# Altium PCB PCB_Amplificator_audio_de_putere-FINAL-var2_2026-01-23.pcbdoc
Units mm, origin at the board's own origin, x right, y up, seen from the top; angles counter-clockwise.
Board outline 79.12 x 80.26 mm, 2 copper layers (Top Layer, Bottom Layer); 40 components, 28 nets, 105 pads, 40 vias.
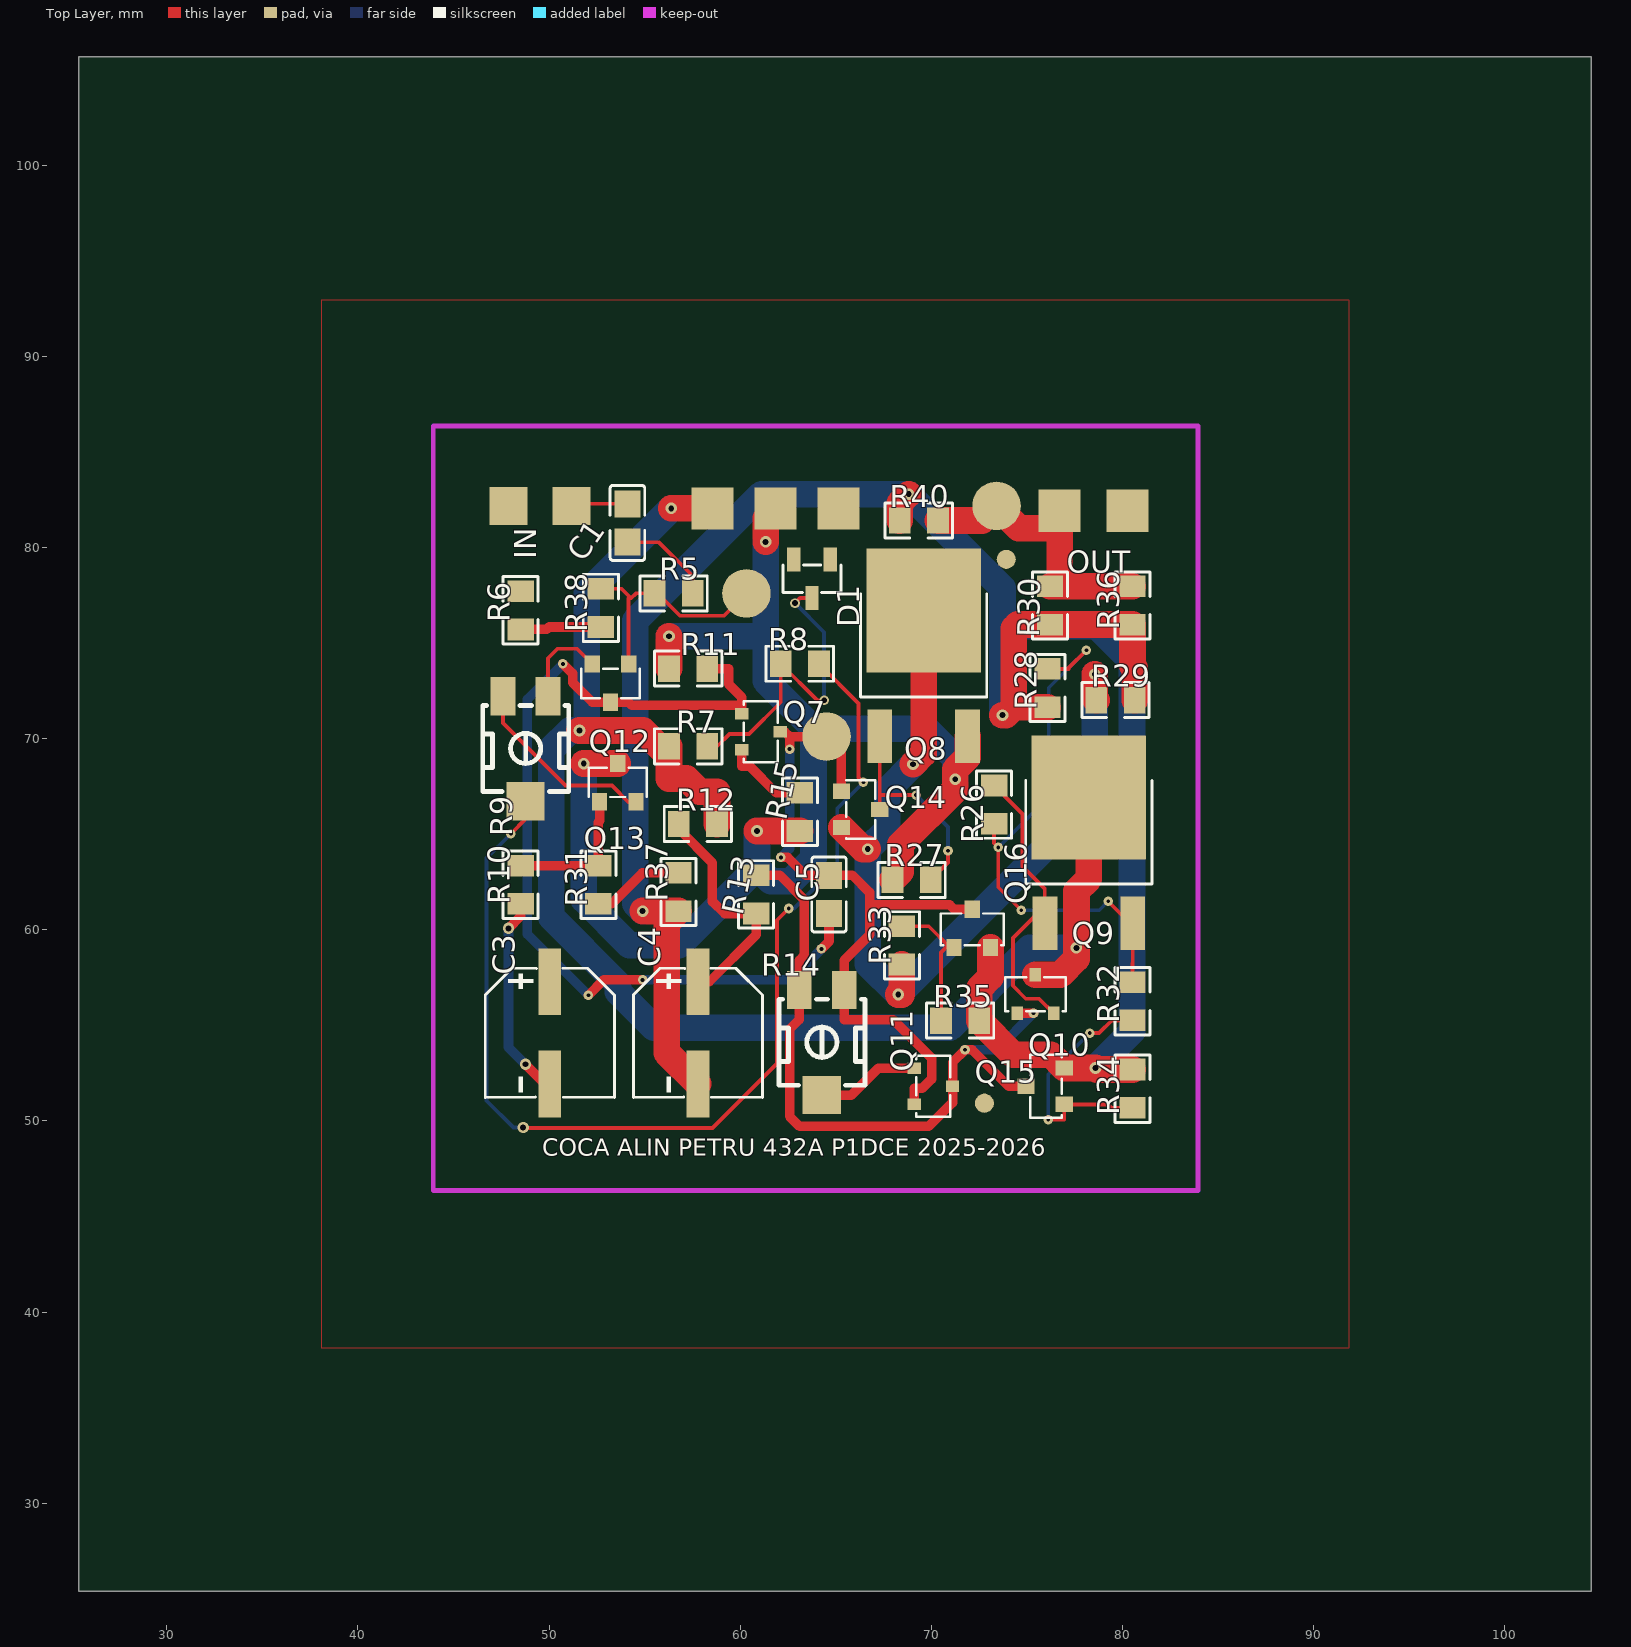
[diagram p0: Top Layer view]
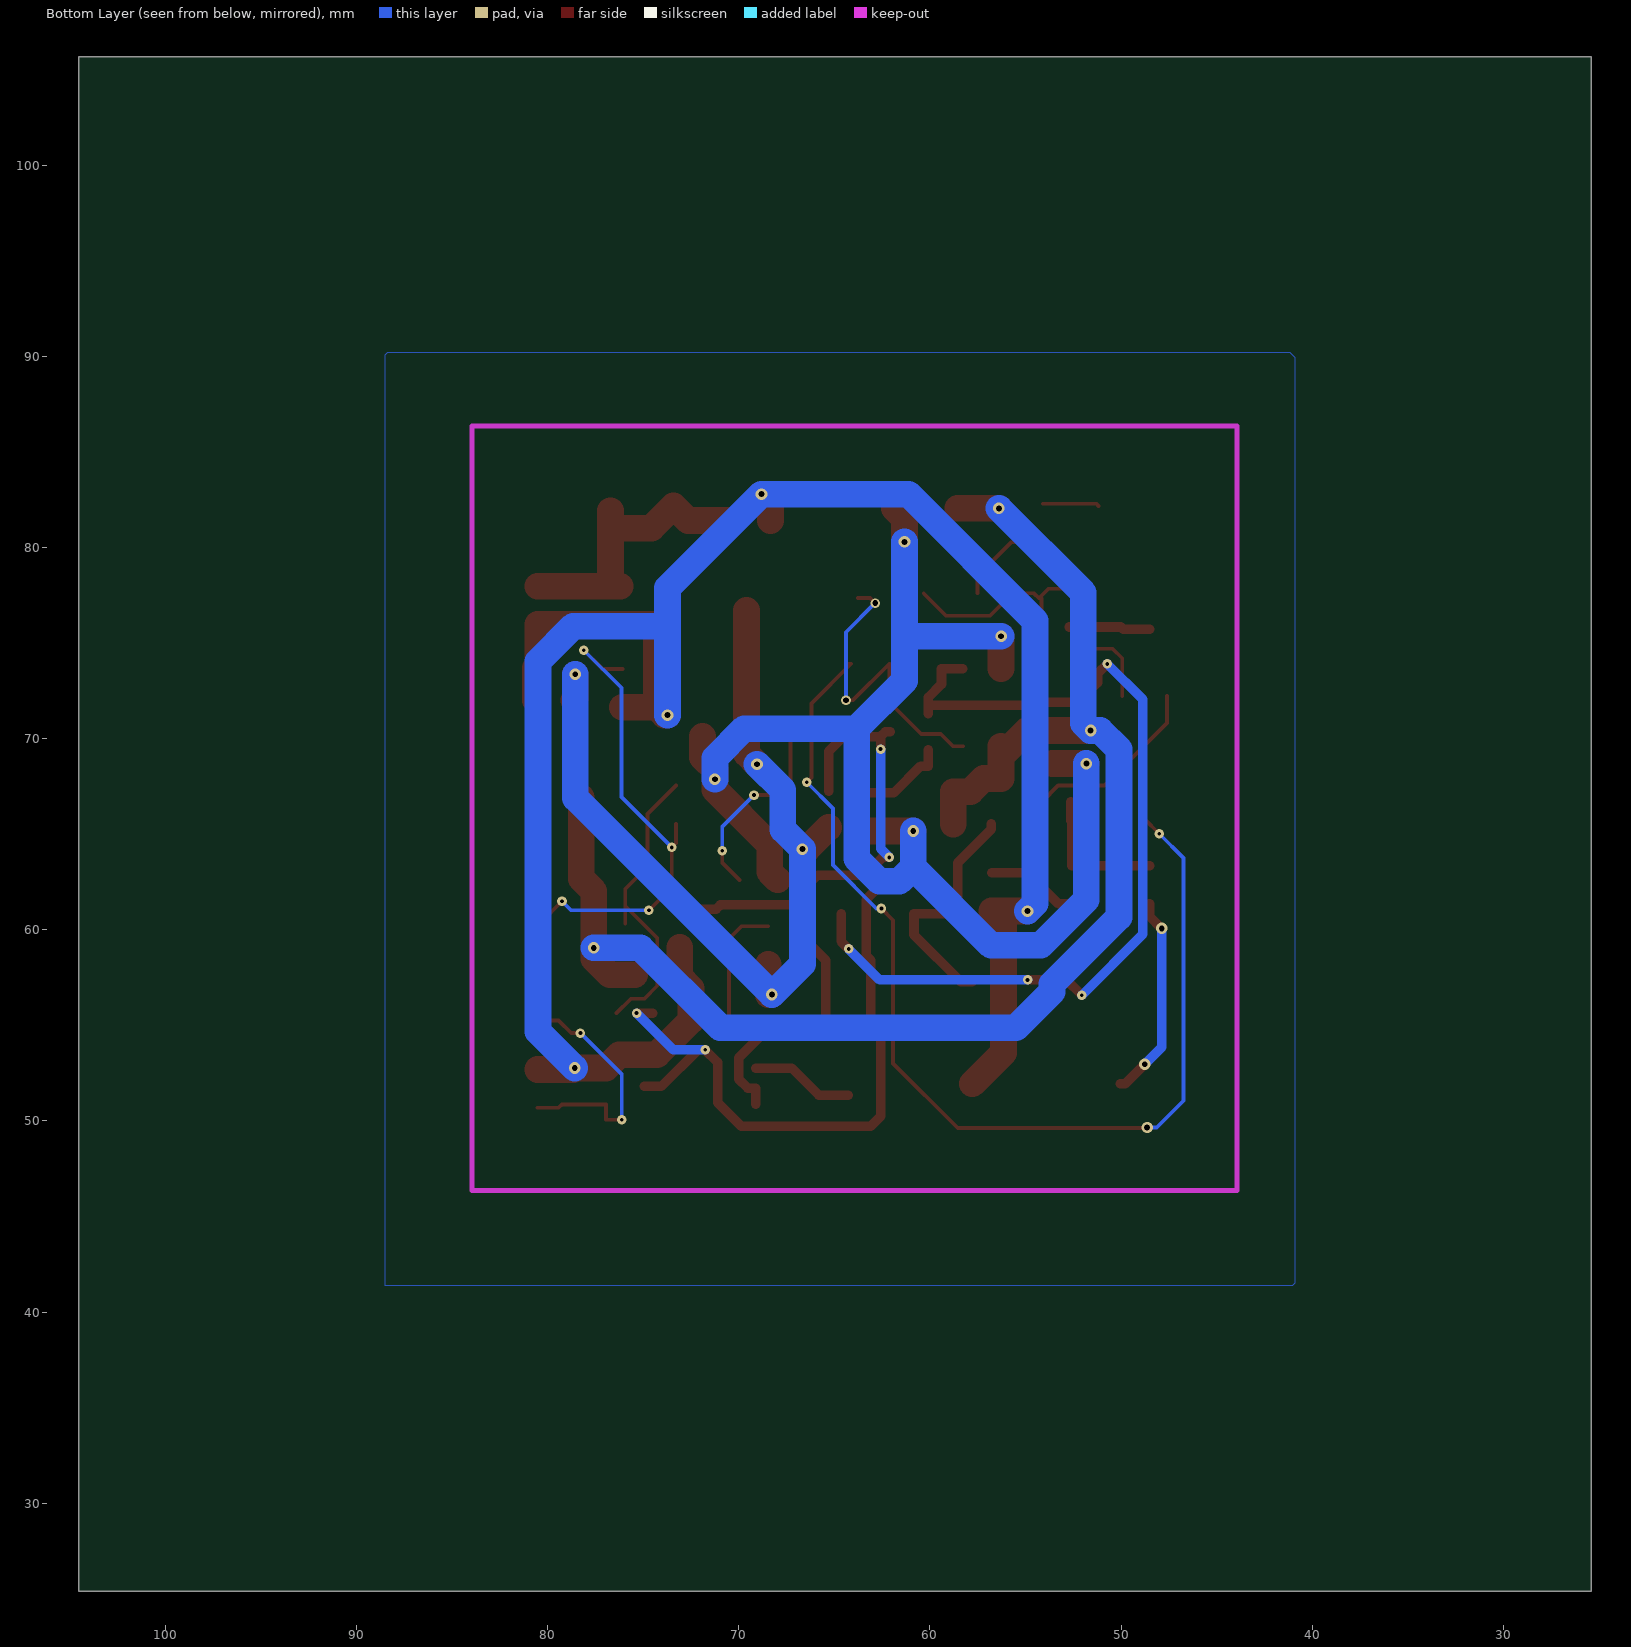
[diagram p1: Bottom Layer view, seen from below]

## Layer stack, top to bottom
Top Layer: signal copper (thickness not stored)
Dielectric: dielectric 0.32, FR-4, Dk 4.8
Bottom Layer: signal copper (thickness not stored)

## Board outline
104.521,25.4 25.4,25.4 25.4,105.664 104.521,105.664

## Components (designator, comment, footprint, x,y, rotation, side; value= is the part's Value field where it differs from the comment)
C1 "4.7u" C0805 54.102,81.28 r270 top
C3 "10uF" CAP-SMD_BD6.3-L6.6-W6.6-FD 50.038,54.61 r270 top
C4 "10uF" CAP-SMD_BD6.3-L6.6-W6.6-FD 57.785,54.61 r270 top
C5 "47p" C0805 64.643,61.849 r90 top
D1 "BZX84C8V2" SOT-23-3_L2.9-W1.3-P1.90-LS2.4-BR 63.754,78.359 r90 top
Q7 "BC817-25" BC817-25-SOT23 61.087,70.358 r270 top
Q8 "MJD31CH" TO-252-2_L6.6-W6.1-P4.60-LS10.0-BR-CW 69.596,73.406 r270 top
Q9 "MJD31CH" TO-252-2_L6.6-W6.1-P4.60-LS10.0-BR-CW 78.232,63.627 r270 top
Q10 "BC817-25" BC817-25-SOT23 75.438,56.642 r0 top
Q11 "BC817-25" BC817-25-SOT23 70.104,51.816 r270 top
Q12 "BC807-25" BC807-25-SOT23 53.213,72.898 r180 top
Q13 "BC807-25" BC807-25-SOT23 53.594,67.691 r0 top
Q14 "BC807-25" BC807-25-SOT23 66.294,66.294 r270 top
Q15 "BC846B" BC846B-SOT23 75.946,51.816 r90 top
Q16 "BC856B" BC856B-SOT23 72.136,60.071 r0 top
R5 "2.2k" R0805 56.515,77.597 r180 top
R6 "15k" R0805 48.514,76.708 r270 top
R7 "3.3k" R0805 57.277,69.596 r180 top
R8 "15k" R0805 63.119,73.914 r180 top
R9 "500" RES-ADJ-SMD_3P-L4.5-W4.5-P2.35-BR 48.768,69.469 r180 top
R10 "3.3k" R0805 48.514,62.357 r90 top
R11 "5.6k" R0805 57.277,73.66 r0 top
R12 "1.8k" R0805 57.785,65.532 r0 top
R13 "1.8k" R0805 60.833,61.849 r270 top
R14 "5kΩ" RES-ADJ-SMD_3P-L4.5-W4.5-P2.35-BR 64.262,54.102 r180 top
R15 "22" R0805 63.119,66.167 r90 top
R26 "33" R0805 73.279,66.548 r90 top
R27 "33" R0805 68.961,62.611 r0 top
R28 "0.47" R0805 76.073,72.644 r90 top
R29 "0.47" R0805 79.629,72.009 r0 top
R30 "0.47" R0805 76.2,76.962 r90 top
R31 "22k" R0805 52.578,62.357 r90 top
R32 "1k" R0805 80.518,56.261 r90 top
R33 "1k" R0805 68.453,59.182 r90 top
R34 "1k" R0805 80.518,51.689 r90 top
R35 "1k" R0805 71.501,55.245 r0 top
R36 "0.47" R0805 80.518,76.962 r90 top
R37 "15k" R0805 56.769,61.976 r90 top
R38 "15k" R0805 52.705,76.835 r90 top
R40 "0.47" R0805 69.342,81.407 r0 top

## Footprints (in the part's own frame and the unit in brackets; to place one, negate y for a bottom-side part, rotate by r counter-clockwise, add the part's x,y. Pads: shape width x height; smd on the part's side, far side on the other; paste and mask are expansions set on the pad)
BC807-25-SOT23 [mm]
  rect 0.8x0.9 smd paste+0 mask+0.051: 1(-0.95,-1) 2(0.95,-1) 3(0,1)
  silkscreen extent -1.52,-0.75 1.52,0.78
BC817-25-SOT23 [mm]
  rect 0.6x0.7 smd paste+0 mask+0.051: 1(-0.95,-1) 2(0.95,-1) 3(0,1)
  silkscreen extent -1.59,-0.91 1.59,0.87
BC846B-SOT23 [mm]
  rect 0.8x0.9 smd paste+0 mask+0.051: 1(-0.95,-1) 2(0.95,-1) 3(0,1)
  silkscreen extent -1.65,-0.87 1.65,0.78
BC856B-SOT23 [mm]
  rect 0.8x0.9 smd paste+0 mask+0.051: 1(-0.95,-1) 2(0.95,-1) 3(0,1)
  silkscreen extent -1.65,-0.87 1.65,0.78
C0805 [mm]
  rect 1.41x1.35 smd paste-100 mask+0.051: 1(-1,0) 2(1,0)
  silkscreen extent -1.96,-0.9 1.96,0.9
CAP-SMD_BD6.3-L6.6-W6.6-FD [mm]
  rect 3.5x1.2 smd paste+0 mask+0.051: 1(-2.67,0) 2(2.67,0)
  silkscreen extent -3.38,-3.38 3.38,3.38
R0805 [mm]
  rect 1.133x1.377 smd paste-100 mask+0.051: 1(-1,0) 2(1,0)
  silkscreen extent -1.76,-0.92 1.76,0.92
RES-ADJ-SMD_3P-L4.5-W4.5-P2.35-BR [mm]
  rect 1.3x2 smd paste+0 mask+0.051: 1(1.175,-2.75) 3(-1.175,-2.75)
  rect 2x2 smd paste+0 mask+0.051: 2(0,2.75)
  silkscreen extent -2.26,-2.26 2.24,2.24
SOT-23-3_L2.9-W1.3-P1.90-LS2.4-BR [mm]
  rect 1.25x0.7 smd paste+0 mask+0.051: 1(1,-0.95) 2(1,0.95) 3(-1,0)
  silkscreen extent -0.73,-1.53 0.73,1.53
TO-252-2_L6.6-W6.1-P4.60-LS10.0-BR-CW [mm]
  rect 2.8x1.3 smd paste+0 mask+0.051: 1(3.292,-2.3) 3(3.292,2.3)
  rect 6.5x6 smd paste+0 mask+0.051: 2(-3.292,0)
  silkscreen extent -4.17,-3.3 1.23,3.3

## Free pads (board coordinates)
  round 2.54 smd paste+0 mask+0.051: 2(60.325,77.597) 3(64.516,70.104) 4(73.406,82.169)
  round 1 smd paste+0 mask+0.051: 5(73.914,79.375) 6(72.771,50.927)
  rect 2x2 smd paste+0 mask+0.051: 6(47.879,82.169) 6(51.181,82.169)
  rect 2.2x2.2 smd paste+0 mask+0.051: 6(58.547,82.042) 6(61.849,82.042) 7(65.151,82.042) 7(76.708,81.915) 7(80.264,81.915)

## Via types
v1: diameter 0.5, hole 0.2, Top Layer to Bottom Layer, tented both sides, 19 vias
v2: diameter 0.61, hole 0.305, Top Layer to Bottom Layer, tented both sides, 16 vias
v3: diameter 0.6, hole 0.3, Top Layer to Bottom Layer, tented both sides, 3 vias
v4: diameter 0.5, hole 0.3, Top Layer to Bottom Layer, tented both sides, 2 vias

## Nets (pads, with @x,y where several pads share a name; then routed paths per layer and width w, separated by ;. In a path a pad name is that pad's centre, name@x,y a point inside that pad or via, vN(x,y) a via of type N, cw(c..) or ccw(c..) an arc to the next point about the centre after c; other vN are vias at no path point)
+12V: pad.6@58.547,82.042 Q9.2 Q10.3 R7.2 R12.2 | length 80.9
  Top Layer w1.4: v2(51.595,70.42) 54.918,70.42 R7.2@56.277,69.061 ; R7.2 R7.2@56.277,69.061 ; v2(56.392,82.042) 56.446,82.042 pad.6@58.547,82.042 ; R12.2 58.785,67.221 57.873,67.221 57.187,67.907 56.277,67.907 R7.2@56.277,69.061 ; Q10.3 76.738,57.642 77.584,58.487 v2(77.584,59.054) 77.584,62.02 78.232,62.669 Q9.2
  Bottom Layer w1.4: v2(56.392,82.042) 51.977,77.627 51.977,70.802 v2(51.595,70.42) 51.093,70.42 50.116,69.443 50.116,60.659 53.612,57.163 53.612,56.757 55.492,54.876 70.96,54.876 75.138,59.054 v2(77.584,59.054)
-12V: pad.6@61.849,82.042 Q8.3 Q13.3 R11.1 R15.1 R27.1 | length 73.1
  Top Layer w1.4: v2(51.818,68.691) Q13.3 ; R11.1 v2(56.277,75.349) ; v2(60.873,65.167) 61.43,65.167 R15.1 ; v2(61.33,80.29) 61.33,81.523 pad.6@61.849,82.042 ; R27.1 68.382,63.032 68.382,64.458 71.246,67.322 v2(71.246,67.869) 71.246,68.373 71.896,69.023 Q8.3
  Bottom Layer w1.4: v2(51.818,68.691) 51.818,61.574 54.206,59.186 56.794,59.186 60.873,63.264 ; v2(56.277,75.349) 61.33,75.349 ; v2(60.873,65.167) 60.873,63.264 ; v2(61.33,80.29) 61.33,75.349 ; v2(71.246,67.869) 71.246,68.99 69.716,70.52 63.833,70.52 ; 60.873,63.264 61.605,62.531 62.643,62.531 63.833,63.721 63.833,70.52 ; 61.33,75.349 61.33,73.023 63.833,70.52
C5_2: C5.2 pad.3 Q7.3 Q11.2 Q14.1 Q16.3 R14.3 | length 38.7
  Top Layer w0.5: Q7.3 62.327,70.358 62.581,70.104 ; v1(62.124,63.783) 62.484,63.783 63.418,62.849 C5.2 65.256,62.849 65.869,62.849 66.765,61.952 66.765,61.3 ; v1(62.581,69.453) 62.581,70.104 ; Q14.1 65.294,69.326 pad.3 62.581,70.104 ; Q11.2 69.104,51.716 69.529,51.716 70.006,52.193 70.006,53.294 67.998,55.302 65.437,55.302 R14.3 65.437,58.402 66.765,59.731 66.765,61.3 ; Q16.3 71.186,61.071 70.956,61.3 66.765,61.3
  Bottom Layer w0.5: v1(62.124,63.783) 62.581,64.24 v1(62.581,69.453)
GND: C3.1 D1.1 pad.6@47.879,82.169 pad.7@65.151,82.042 pad.7@80.264,81.915 R6.1
Q11_1: Q11.1 R14.2 | length 5.4
  Top Layer w0.5: R14.2 65.812,51.352 67.226,52.766 Q11.1
R5_1: C1.2 R5.1 | length 5
  Top Layer w0.2: C1.2 55.753,80.264 57.516,78.501 R5.1
R5_2: pad.2 Q12.1 R5.2 R38.2 | length 12.3
  Top Layer w0.2: R38.2 53.794,77.835 54.29,77.339 54.548,77.597 55.032,77.597 R5.2 55.685,77.597 56.856,76.426 59.154,76.426 pad.2 ; Q12.1 54.163,77.339
R8_2: D1.3 R7.1 R8.2 | length 16.6
  Top Layer w0.2: R7.1 58.801,69.596 59.436,70.231 60.452,70.231 62.119,71.898 R8.2 64.024,72.009 v4(64.389,72.009) ; v4(62.865,77.089) 63.135,77.359 D1.3
  Bottom Layer w0.2: v4(62.865,77.089) 64.389,75.565 v4(64.389,72.009)
R9_1: Q13.2 R9.1 | length 10.1
  Top Layer w0.2: R9.1 47.593,70.818 50.869,67.543 53.292,67.543 54.144,66.691 Q13.2
R9_2: R8.1 R9.2 | length 57.8
  Top Layer w0.2: v1(48.006,65.024) 48.768,65.786 R9.2 ; v3(48.641,49.657) 48.672,49.626 58.544,49.626 61.923,53.007 61.923,60.498 v1(62.54,61.113) ; R8.1@64.324,73.914 R8.1 66.194,71.839 66.194,67.964 v1(66.442,67.716)
  Bottom Layer w0.2: v1(48.006,65.024) 46.736,63.754 46.736,51.054 48.133,49.657 v3(48.641,49.657) ; v1(62.54,61.113) 62.805,61.113 65.074,63.382 65.074,66.348 v1(66.442,67.716)
R9_3: Q12.2 R9.3 | length 4.8
  Top Layer w0.2: R9.3 49.943,74.202 50.441,74.699 51.462,74.699 Q12.2
R10_1: C3.2 R10.1 | length 10.7
  Top Layer w0.5: v3(47.879,60.071) 48.514,60.706 R10.1 ; v3(48.768,52.959) 49.787,51.94 C3.2
  Bottom Layer w0.5: v3(47.879,60.071) 47.879,53.848 v3(48.768,52.959)
R10_2: Q13.1 R10.2 R31.2 | length 7.4
  Top Layer w0.5: R10.2 49.753,63.357 R31.2 52.578,65.624 52.644,65.69 Q13.1
R11_2: C5.1 Q7.1 Q12.3 R11.2 | length 48.9
  Top Layer w0.5: v1(50.726,73.909) 51.228,73.406 51.228,72.932 52.263,71.898 Q12.3 53.688,71.898 54.163,71.898 54.328,71.733 60.087,71.733 ; v1(52.055,56.574) 52.858,57.377 v1(54.89,57.377) ; R11.2 59.394,73.66 59.394,72.851 60.087,72.158 60.087,71.733 ; Q7.1 60.087,71.733 ; v1(64.249,58.998) 64.643,59.392 C5.1
  Bottom Layer w0.5: v1(50.726,73.909) 48.86,72.043 48.86,59.769 v1(52.055,56.574) ; v1(54.89,57.377) 62.628,57.377 v1(64.249,58.998)
R12_1: C4.1 R12.1 R13.2 | length 12.5
  Top Layer w0.5: R12.1 56.784,65.263 58.547,63.5 58.547,61.468 59.197,60.848 R13.2 ; C4.1 58.381,57.28 60.833,59.732 60.833,60.291 R13.2
R13_1: Q10.1 Q11.3 Q15.3 R13.1 R14.1 | length 36.6
  Top Layer w0.5: R13.1 62.072,62.849 63.341,61.58 63.341,58.656 63.087,58.402 R14.1 63.087,56.077 63.087,55.302 62.581,54.795 62.581,50.238 63.103,49.715 69.853,49.715 71.104,50.966 Q11.3 ; 71.104,51.391 Q11.3 ; Q10.1 v1(75.338,55.642) ; Q15.3 74.041,51.816 72.136,53.721 v1(71.755,53.721) 71.104,53.07 Q11.3
  Bottom Layer w0.5: v1(71.755,53.721) 73.417,53.721 v1(75.338,55.642)
R15_2: Q7.2 R15.2 | length 4.5
  Top Layer w0.5: Q7.2 60.087,68.558 60.489,68.558 61.88,67.167 R15.2
R26_2: Q9.1 Q10.2 R26.2 | length 15.9
  Top Layer w0.2: R26.2 74.764,66.063 74.764,63.304 75.932,62.135 Q9.1@75.932,61.235 ; Q9.1@75.932,60.335 Q9.1@75.932,61.235 ; Q10.2 75.635,56.395 74.937,56.395 74.262,57.069 74.262,59.566 Q9.1@75.932,61.235
R27_2: Q8.1 Q14.3 R27.2 | length 11.2
  Top Layer w0.2: Q14.3 67.294,67.044 67.296,67.046 ; Q8.1@67.296,70.114 67.296,68.314 67.296,67.046 ; v1(69.2,67.046) 67.296,67.046 ; R27.2 70.866,63.516 v1(70.866,64.135)
  Bottom Layer w0.2: v1(69.2,67.046) 70.866,65.38 v1(70.866,64.135)
R29_1: Q8.2 Q14.2 R29.1 R33.1 | length 47.9
  Top Layer w1.4: Q14.2 66.418,64.22 v2(66.669,64.22) ; v2(68.267,56.615) 68.453,56.615 R33.1 ; v2(69.04,68.656) 69.596,69.212 Q8.2 ; v2(78.548,73.363) 78.548,72.09 R29.1
  Bottom Layer w1.4: v2(69.04,68.656) 67.693,67.309 67.693,65.243 v2(66.669,64.22) 66.669,58.212 v2(68.267,56.615) 78.548,66.896 v2(78.548,73.363)
R29_2: C4.2 Q15.2 Q16.2 R28.1 R29.2 R30.1 R34.2 R35.2 R36.1 R37.1 R40.1 | length 119.1
  Top Layer w1.4: v2(54.896,60.976) R37.1 56.158,60.365 56.158,53.567 C4.2 ; R40.1 68.342,82.314 v2(68.812,82.784) ; Q16.2 73.086,57.519 72.501,56.934 72.501,55.694 R35.2 74.278,53.468 76.244,53.468 Q15.2 77.671,52.766 v2(78.581,52.766) 78.658,52.689 R34.2 ; v2(73.722,71.225) 73.893,71.225 74.312,71.644 ; R28.1 74.384,71.644 74.312,71.644 ; R29.2 80.629,73.698 80.518,73.809 R36.1 R30.1 74.511,75.962 74.312,75.763 74.312,71.644
  Bottom Layer w1.4: v2(54.896,60.976) 54.504,61.367 54.504,76.165 61.124,82.784 v2(68.812,82.784) 73.722,77.874 73.722,75.875 ; v2(73.722,71.225) 73.722,75.875 ; v2(78.581,52.766) 80.496,54.682 80.496,74.037 78.658,75.875 73.722,75.875
R32_1: Q15.1 R32.1 R34.1 | length 13.2
  Top Layer w0.2: v1(76.114,50.065) 76.946,50.065 Q15.1 79.252,50.866 79.429,50.689 R34.1 ; v1(78.283,54.592) 78.76,54.592 79.429,55.261 R32.1
  Bottom Layer w0.2: v1(76.114,50.065) 76.114,52.423 v1(78.283,54.592)
R32_2: Q9.3 R26.1 R28.2 R32.2 | length 29.4
  Top Layer w0.2: R26.1 73.279,64.528 v1(73.499,64.308) 73.499,62.223 v1(74.697,61.024) ; R28.2 77.162,73.644 77.162,73.683 v1(78.103,74.624) ; v1(79.245,61.489) 80.399,60.335 Q9.3 80.532,58.242 80.518,58.228 R32.2
  Bottom Layer w0.2: v1(73.499,64.308) 76.135,66.945 76.135,72.656 v1(78.103,74.624) ; v1(74.697,61.024) 78.78,61.024 v1(79.245,61.489)
R35_1: Q16.1 R33.2 R35.1 | length 7.3
  Top Layer w0.2: R33.2 69.864,60.182 Q16.1@70.975,59.071 ; R35.1 70.501,58.808 70.764,59.071 Q16.1@70.975,59.071 ; Q16.1 Q16.1@70.975,59.071
R37_2: R31.1 R37.2 | length 4.9
  Top Layer w0.5: R31.1 53.265,61.357 54.884,62.976 55.53,62.976 R37.2
R38_1: R6.2 R38.1 | length 4.2
  Top Layer w0.5: R6.2 49.88,75.708 50.007,75.835 R38.1
UIN: C1.1 pad.6@51.181,82.169 | length 3
  Top Layer w0.2: pad.6@51.181,82.169 51.292,82.28 C1.1
UOUT: pad.4 pad.7@76.708,81.915 R30.2 R36.2 R40.2 | length 15.4
  Top Layer w1.4: R40.2 72.644,81.407 pad.4 74.568,81.007 pad.7@76.708,81.007 ; R30.2 R30.2@76.708,77.962 ; pad.7@76.708,81.915 pad.7@76.708,81.007 ; R36.2 R30.2@76.708,77.962 ; R30.2@76.708,77.962 76.708,79.814 pad.7@76.708,81.007
pads on no net: D1.2

## Polygon pours and split planes (outlines as drawn)
GND on Bottom Layer (solid): 88.519,90.043 88.519,41.402 41.021,41.402 40.894,41.529 40.894,89.916 41.148,90.17 88.392,90.17 88.519,90.043
GND on Top Layer (solid): 38.227,92.964 91.821,92.964 91.821,38.1 38.1,38.1 38.1,92.964

## Silkscreen, mask and mechanical layers (free items; w line width, h text height)
Top Overlay:
  text "IN" at 49.34,79.375 h1.14 r90
  text "OUT" at 77.089,78.676 h1.14
  text "COCA ALIN PETRU 432A P1DCE 2025-2026" at 49.657,48.189 h0.9
Top Solder:
  circle w0.406: c73.914,79.375 r0.635
  circle w0.406: c72.771,50.927 r0.635